# Altium PCB STM32F429VET6_SRK1201L.PcbDoc (part 2 of 2)
Units mil, origin at the board's own origin, x right, y up, seen from the top; angles counter-clockwise.
Board outline 1653 x 1966 mil, 4 copper layers (Top Layer, Layer 1, Layer 2, Bottom Layer), stack 23.756 mil thick; 125 components, 111 nets, 424 pads, 295 vias.
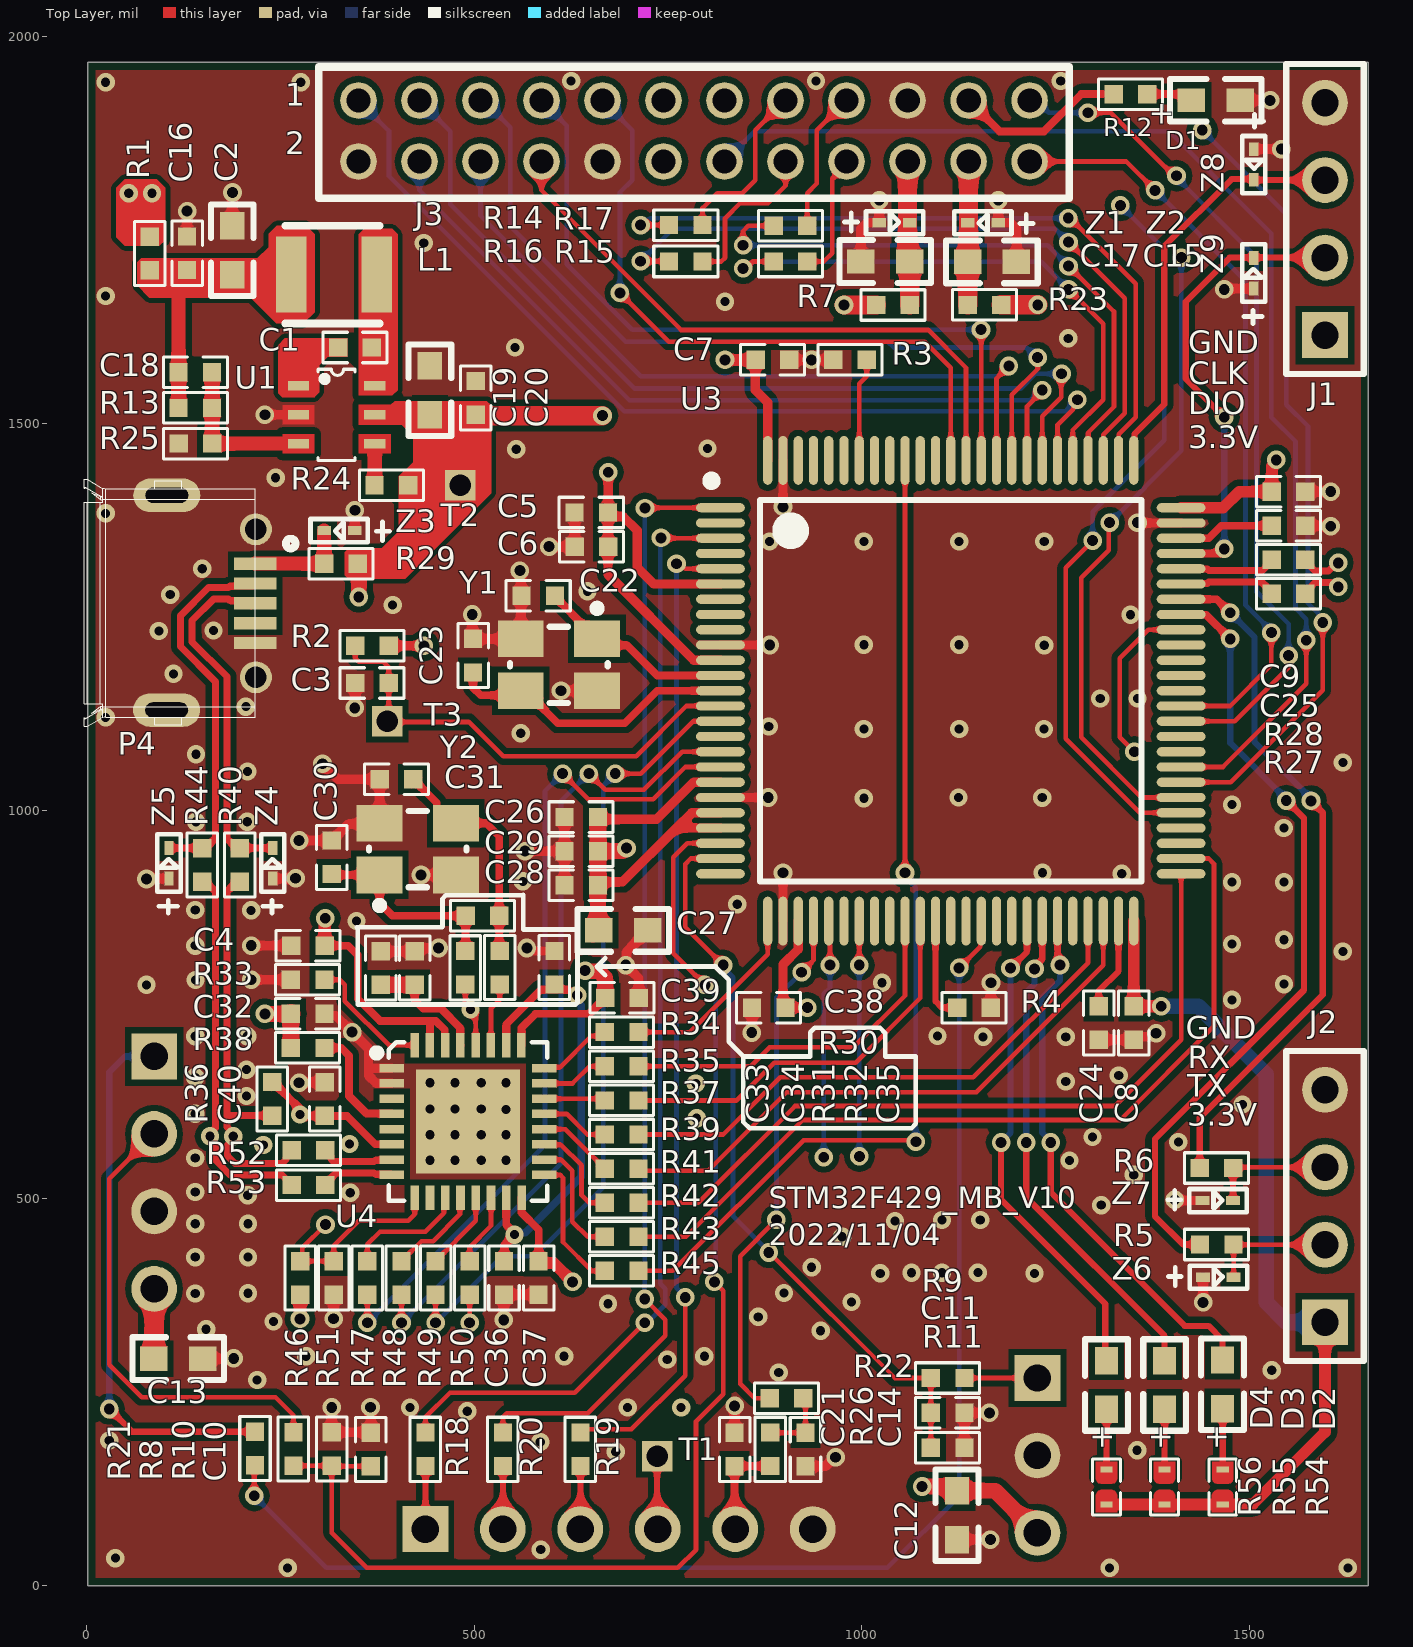
[diagram p0: Top Layer view]

## Silkscreen, mask and mechanical layers (free items; w line width, h text height) (continued)
Top Overlay: (continued)
  lines w5.98: 348.54,849.85 458.56,849.85 459,850.29 459,886.63 463.37,891 562.69,891 563.16,891.46 563.16,846.87 632.09,846.87 633.28,845.68 633.28,752.28 631,750 350,750 349.59,750.41 349.59,849.85 ; 669,788 658,799 ; 669,810 658,799 ; 658,799 811.3,799 828.56,781.74 828.56,701.74 847.29,683.01 ; 847.29,683.01 933.65,683.01 933.65,714.27 939.22,719.84 1023.68,719.84 1030.34,713.18 1030.34,683.01 1070,683.01 1070,596 1064.32,590.32 855.36,590.32 847.29,598.4 847.29,683.01
  text "1" at 256.07,1900.04 h50
  text "2" at 256.07,1838 h50
  text "GND" at 1421.43,1580.72 h50
  text "CLK" at 1421.43,1540.93 h50
  text "DIO" at 1421.43,1502 h50
  text "3.3V" at 1421.43,1458.19 h50
  text "GND" at 1418.47,695.87 h50
  text "RX" at 1420.75,658.37 h50
  text "TX" at 1420.47,621.05 h50
  text "3.3V" at 1420.32,583.67 h50
  text "STM32F429_MB_V10 / 2022/11/04" at 880,430.5 h47.24
Mechanical 1:
  the board outline again, w5.98

## Text inside footprints (layer, text, board x,y; h text height)
D1: Top Overlay "+" at 1370.32,1876.88 h50
D2: Top Overlay "+" at 1480.63,174.68 h50 r90
D3: Top Overlay "+" at 1408.74,174.45 h50 r90
D4: Top Overlay "+" at 1333.26,174.45 h50 r90